# Altium PCB Ver1.0-2242_2023-12-28.pcbdoc
Units mm, origin at the board's own origin, x right, y up, seen from the top; angles counter-clockwise.
Board outline 47.51 x 70.74 mm, 2 copper layers (Top Layer, Bottom Layer); 12 components, 39 nets, 344 pads, 61 vias.
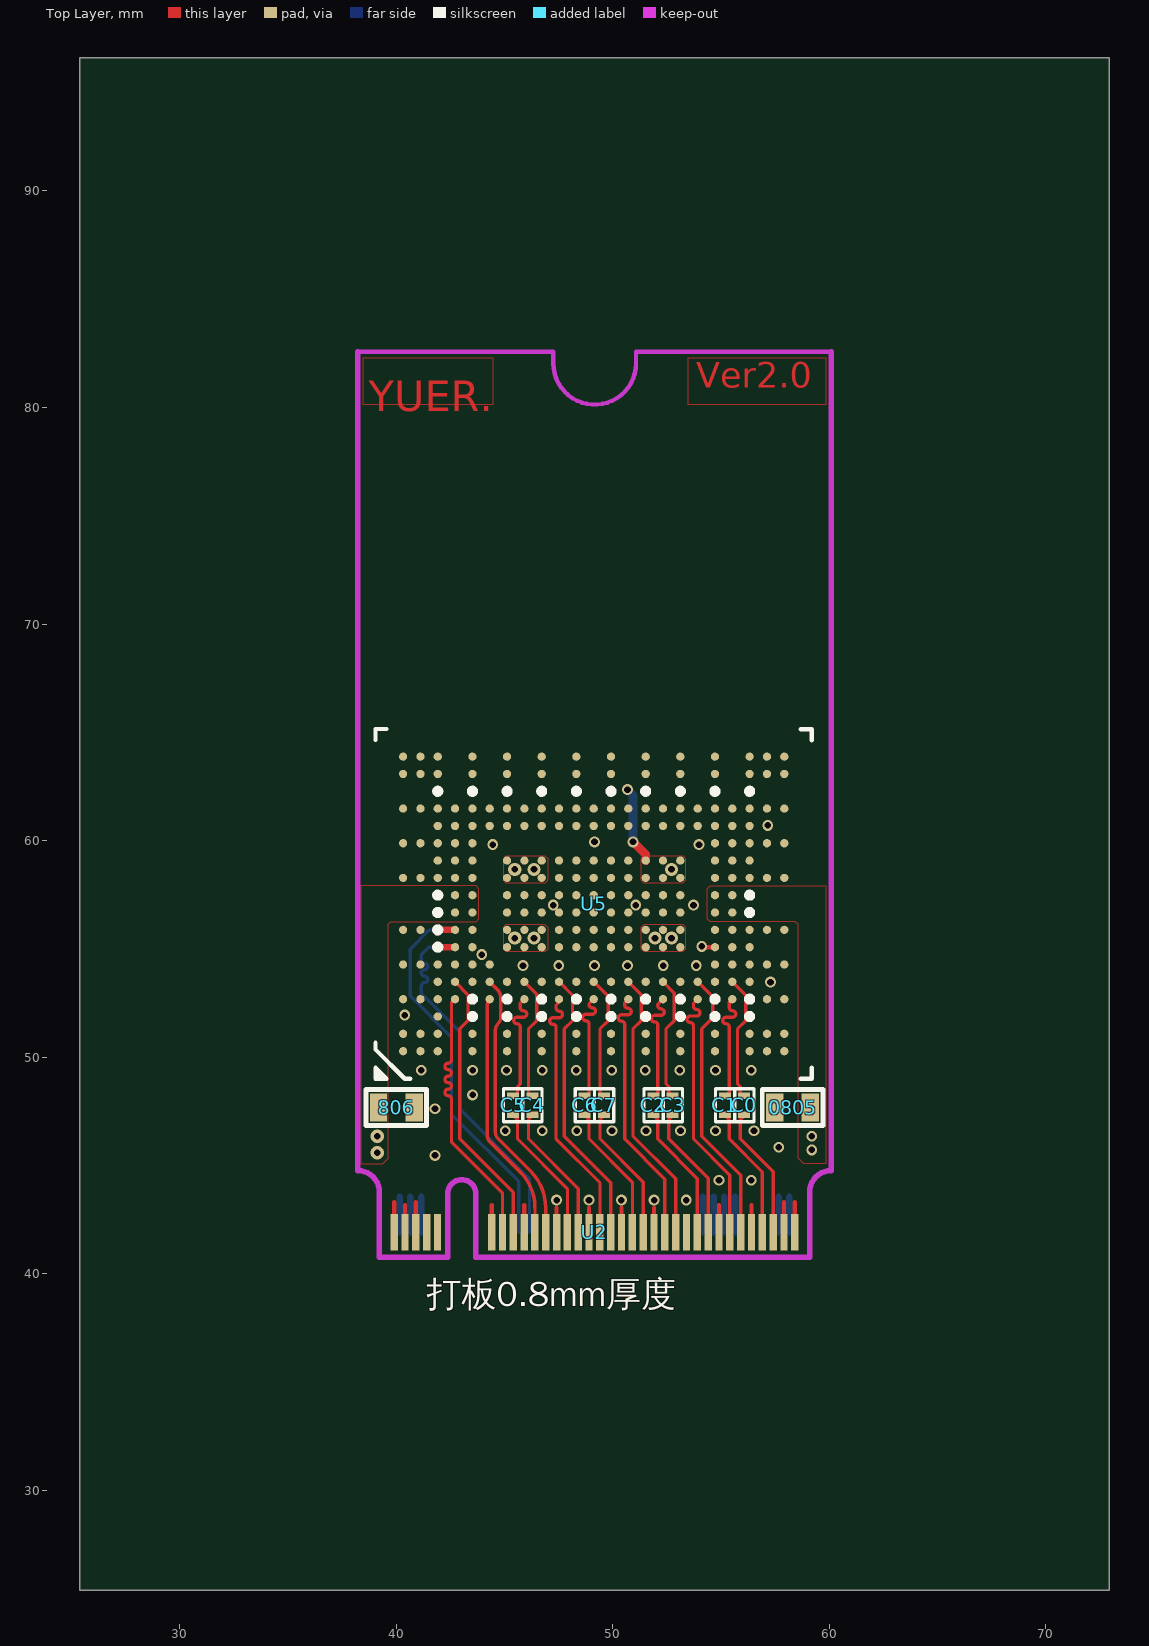
[diagram p0: Top Layer view]
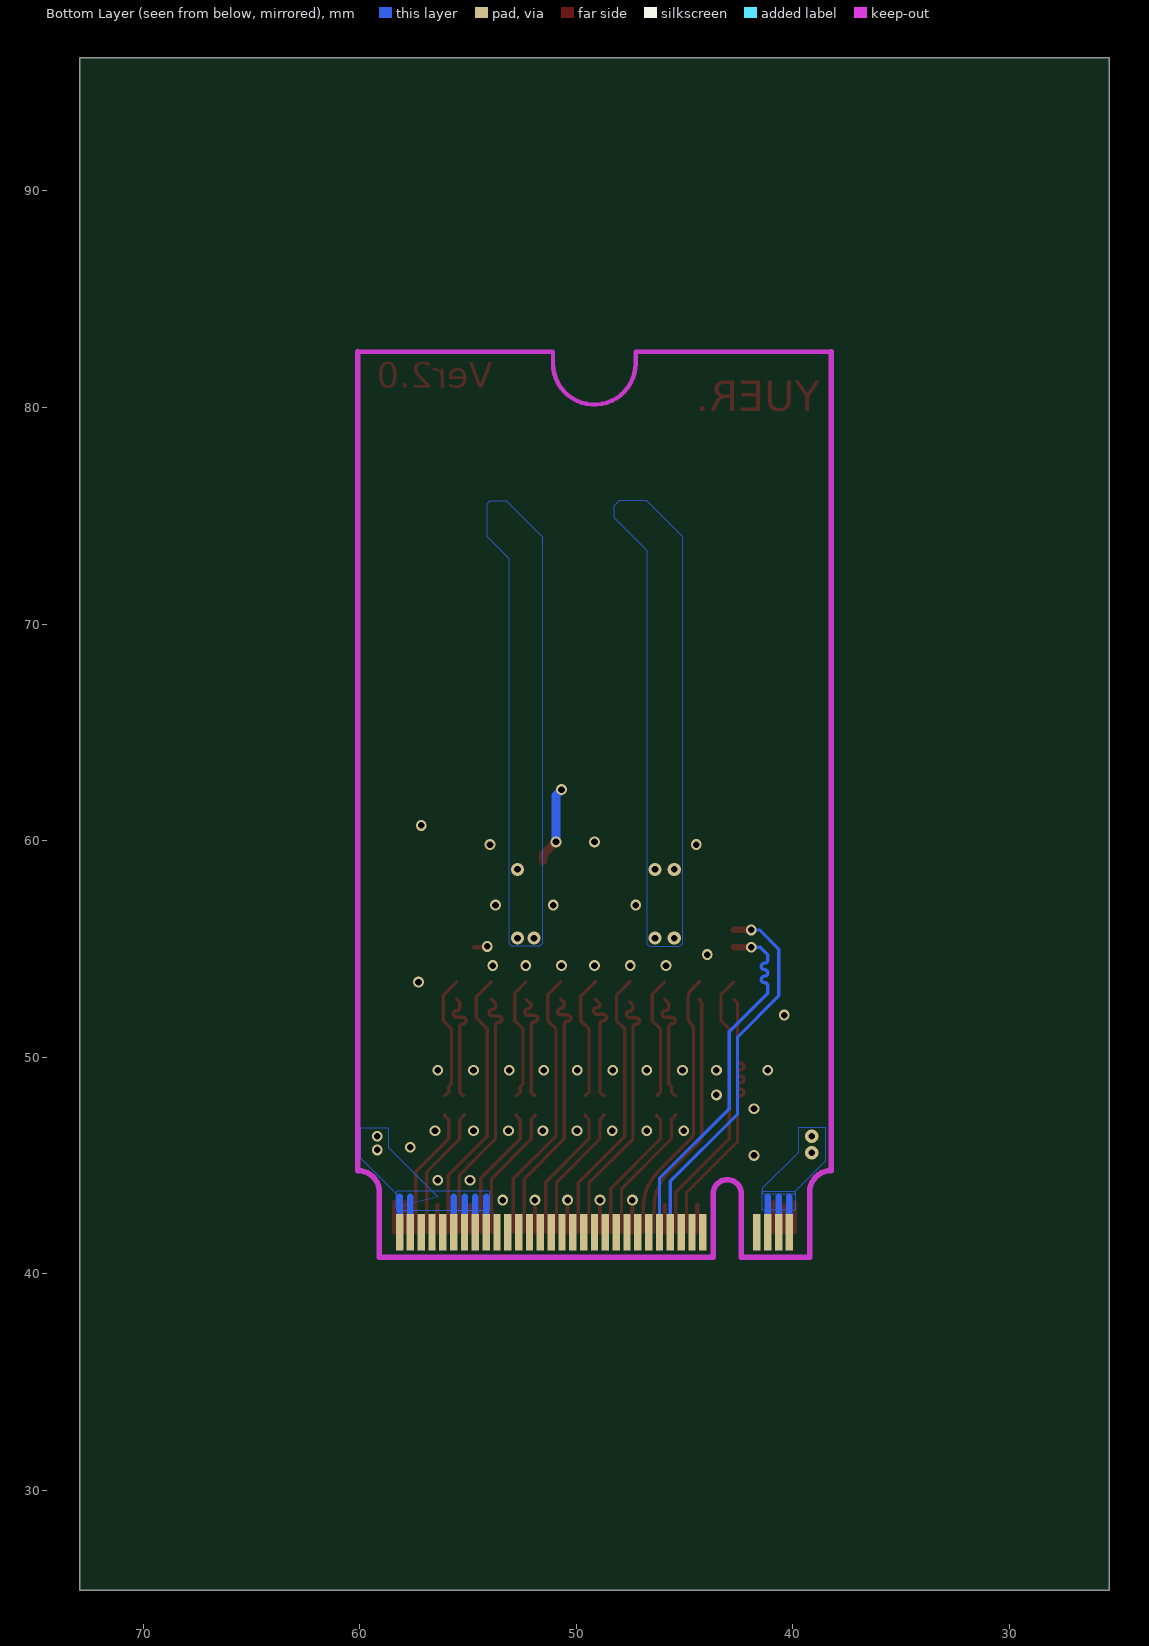
[diagram p1: Bottom Layer view, seen from below]

## Layer stack, top to bottom
Top Layer: signal copper (thickness not stored)
Dielectric: dielectric 0.32, FR-4, Dk 4.8
Bottom Layer: signal copper (thickness not stored)

## Board outline
72.913,25.4 25.4,25.4 25.4,96.139 72.913,96.139

## Components (designator, comment, footprint, x,y, rotation, side; value= is the part's Value field where it differs from the comment)
0805 "_" ?#1 59.571,48.895 r0 top
806 "_" ?#1 41.283,48.895 r0 top
C0 "0402" ?#2 57.285,47.244 r270 top
C1 "0402" ?#2 56.396,47.244 r270 top
C2 "0402" ?#2 53.094,47.244 r270 top
C3 "0402" ?#2 53.983,47.244 r270 top
C4 "0402" ?#2 47.506,47.244 r270 top
C5 "0402" ?#2 46.617,47.244 r270 top
C6 "0402" ?#2 49.919,47.244 r270 top
C7 "0402" ?#2 50.808,47.244 r270 top
U2 "M.2 M KEY FINGERS" "M.2 M KEY FINGERS" 49.157,40.767 r270 top
U5 "1620 BGA291SSD" "1620 BGA291SSD" 49.03,57.023 r0 top

## Footprints (in the part's own frame and the unit in brackets; to place one, negate y for a bottom-side part, rotate by r counter-clockwise, add the part's x,y. Pads: shape width x height; smd on the part's side, far side on the other; paste and mask are expansions set on the pad)
"1620 BGA291SSD" [mil]
  round 15.06 smd paste-3937 mask+2: A1(-342.92,-265.44) A2(-342.92,-233.94) A4(-342.92,-170.95) A6(-342.92,-107.96) A8(-342.92,-44.97) A11(-342.92,49.52) A13(-342.92,112.51) A15(-342.92,175.51) A17(-342.92,238.5) A18(-342.92,269.99) AA1(287,-265.44) AA2(287,-233.94) AA5(287,-139.45) AA6(287,-107.96) AA7(287,-76.46) AA8(287,-44.97) AA11(287,49.52) AA12(287,81.02) AA13(287,112.51) AA14(287,144.01) AA15(287,175.51) AA17(287,238.5) AA18(287,269.99) AB1(318.5,-265.44) AB2(318.5,-233.94) AB4(318.5,-170.95) AB6(318.5,-107.96) AB8(318.5,-44.97) AB11(318.5,49.52) AB13(318.5,112.51) AB15(318.5,175.51) AB17(318.5,238.5) AB18(318.5,269.99) AC1(350,-265.44) AC2(350,-233.94) AC4(350,-170.95) AC6(350,-107.96) AC8(350,-44.97) AC11(350,49.52) AC13(350,112.51) AC15(350,175.51) AC17(350,238.5) AC18(350,269.99) B1(-311.42,-265.44) B2(-311.42,-233.94) B4(-311.42,-170.95) B6(-311.42,-107.96) B8(-311.42,-44.97) B11(-311.42,49.52) B13(-311.42,112.51) B15(-311.42,175.51) B17(-311.42,238.5) B18(-311.42,269.99) C1(-279.92,-265.44) C2(-279.92,-233.94) C3(-279.92,-202.44) C4(-279.92,-170.95) C5(-279.92,-139.45) C6(-279.92,-107.96) C11(-279.92,49.52) C12(-279.92,81.02) C13(-279.92,112.51) C14(-279.92,144.01) C15(-279.92,175.51) C17(-279.92,238.5) C18(-279.92,269.99) D4(-248.43,-170.95) D5(-248.43,-139.45) D6(-248.43,-107.96) D7(-248.43,-76.46) D8(-248.43,-44.97) D9(-248.43,-13.47) D10(-248.43,18.03) D11(-248.43,49.52) D12(-248.43,81.02) D13(-248.43,112.51) D14(-248.43,144.01) D15(-248.43,175.51) E1(-216.93,-265.44) E2(-216.93,-233.94) E5(-216.93,-139.45) E6(-216.93,-107.96) E7(-216.93,-76.46) E8(-216.93,-44.97) E9(-216.93,-13.47) E10(-216.93,18.03) E11(-216.93,49.52) E12(-216.93,81.02) E13(-216.93,112.51) E14(-216.93,144.01) E15(-216.93,175.51) E17(-216.93,238.5) E18(-216.93,269.99) F4(-185.44,-170.95) F5(-185.44,-139.45) F6(-185.44,-107.96) F14(-185.44,144.01) F15(-185.44,175.51) G1(-153.94,-265.44) G2(-153.94,-233.94) G5(-153.94,-139.45) G7(-153.94,-76.46) G8(-153.94,-44.97) G9(-153.94,-13.47) G10(-153.94,18.03) G11(-153.94,49.52) G12(-153.94,81.02) G14(-153.94,144.01) G15(-153.94,175.51) G17(-153.94,238.5) G18(-153.94,269.99) H4(-122.44,-170.95) H5(-122.44,-139.45) H7(-122.44,-76.46) H8(-122.44,-44.97) H9(-122.44,-13.47) H10(-122.44,18.03) H11(-122.44,49.52) H12(-122.44,81.02) H14(-122.44,144.01) H15(-122.44,175.51) J1(-90.95,-265.44) J2(-90.95,-233.94) J5(-90.95,-139.45) J7(-90.95,-76.46) J8(-90.95,-44.97) J9(-90.95,-13.47) J10(-90.95,18.03) J11(-90.95,49.52) J12(-90.95,81.02) J14(-90.95,144.01) J15(-90.95,175.51) J17(-90.95,238.5) J18(-90.95,269.99) K4(-59.45,-170.95) K5(-59.45,-139.45) K7(-59.45,-76.46) K8(-59.45,-44.97) K9(-59.45,-13.47) K10(-59.45,18.03) K11(-59.45,49.52) K12(-59.45,81.02) K14(-59.45,144.01) K15(-59.45,175.51) L1(-27.96,-265.44) L2(-27.96,-233.94) L5(-27.96,-139.45) L7(-27.96,-76.46) L8(-27.96,-44.97) L9(-27.96,-13.47) L10(-27.96,18.03) L11(-27.96,49.52) L12(-27.96,81.02) L14(-27.96,144.01) L15(-27.96,175.51) L17(-27.96,238.5) L18(-27.96,269.99) M4(3.54,-170.95) M5(3.54,-139.45) M7(3.54,-76.46) M8(3.54,-44.97) M9(3.54,-13.47) M10(3.54,18.03) M11(3.54,49.52) M12(3.54,81.02) M14(3.54,144.01) M15(3.54,175.51) N1(35.04,-265.44) N2(35.04,-233.94) N5(35.04,-139.45) N7(35.04,-76.46) N8(35.04,-44.97) N9(35.04,-13.47) N10(35.04,18.03) N11(35.04,49.52) N12(35.04,81.02) N14(35.04,144.01) N15(35.04,175.51) N17(35.04,238.5) N18(35.04,269.99) P4(66.53,-170.95) P5(66.53,-139.45) P7(66.53,-76.46) P8(66.53,-44.97) P9(66.53,-13.47) P10(66.53,18.03) P11(66.53,49.52) P12(66.53,81.02) P14(66.53,144.01) P15(66.53,175.51) R1(98.03,-265.44) R2(98.03,-233.94) R5(98.03,-139.45) R7(98.03,-76.46) R8(98.03,-44.97) R9(98.03,-13.47) R10(98.03,18.03) R11(98.03,49.52) R12(98.03,81.02) R14(98.03,144.01) R15(98.03,175.51) R17(98.03,238.5) R18(98.03,269.99) T4(129.52,-170.95) T5(129.52,-139.45) T7(129.52,-76.46) T8(129.52,-44.97) T9(129.52,-13.47) T10(129.52,18.03) T11(129.52,49.52) T12(129.52,81.02) T14(129.52,144.01) T15(129.52,175.51) U1(161.02,-265.44) U2(161.02,-233.94) U5(161.02,-139.45) U7(161.02,-76.46) U8(161.02,-44.97) U9(161.02,-13.47) U10(161.02,18.03) U11(161.02,49.52) U12(161.02,81.02) U14(161.02,144.01) U15(161.02,175.51) U17(161.02,238.5) U18(161.02,269.99) V4(192.52,-170.95) V5(192.52,-139.45) V14(192.52,144.01) V15(192.52,175.51) W1(224.01,-265.44) W2(224.01,-233.94) W5(224.01,-139.45) W6(224.01,-107.96) W7(224.01,-76.46) W8(224.01,-44.97) W9(224.01,-13.47) W10(224.01,18.03) W11(224.01,49.52) W12(224.01,81.02) W13(224.01,112.51) W14(224.01,144.01) W15(224.01,175.51) W17(224.01,238.5) W18(224.01,269.99) Y4(255.51,-170.95) Y5(255.51,-139.45) Y6(255.51,-107.96) Y7(255.51,-76.46) Y8(255.51,-44.97) Y9(255.51,-13.47) Y10(255.51,18.03) Y11(255.51,49.52) Y12(255.51,81.02) Y13(255.51,112.51) Y14(255.51,144.01) Y15(255.51,175.51)
  silkscreen extent -393,-316 400,320
"M.2 M KEY FINGERS" [mm]
  rect 1.7x0.34 smd paste+0 mask+0.102: 1(-1.15,9.25) 3(-1.15,8.75) 5(-1.15,8.249) 7(-1.15,7.749) 9(-1.15,7.249) 11(-1.15,6.749) 13(-1.15,6.249) 15(-1.15,5.749) 17(-1.15,5.249) 19(-1.15,4.749) 21(-1.15,4.249) 23(-1.15,3.749) 25(-1.15,3.249) 27(-1.15,2.749) 29(-1.15,2.249) 31(-1.15,1.749) 33(-1.15,1.249) 35(-1.15,0.749) 37(-1.15,0.249) 39(-1.15,-0.251) 41(-1.15,-0.751) 43(-1.15,-1.251) 45(-1.15,-1.751) 47(-1.15,-2.251) 49(-1.15,-2.751) 51(-1.15,-3.251) 53(-1.15,-3.751) 55(-1.15,-4.251) 57(-1.15,-4.751) 67(-1.15,-7.251) 69(-1.15,-7.751) 71(-1.15,-8.251) 73(-1.15,-8.751) 75(-1.15,-9.251)
  rect 1.7x0.34 smd far side paste+0 mask+0.102: 2(-1.15,9) 4(-1.15,8.501) 6(-1.15,8.001) 8(-1.15,7.501) 10(-1.15,7.001) 12(-1.15,6.501) 14(-1.15,6.001) 16(-1.15,5.501) 18(-1.15,5.001) 20(-1.151,4.499) 22(-1.15,4.001) 24(-1.15,3.501) 26(-1.15,3.001) 28(-1.15,2.501) 30(-1.15,2.001) 32(-1.15,1.501) 34(-1.15,1.001) 36(-1.15,0.501) 38(-1.15,0.001) 40(-1.15,-0.499) 42(-1.151,-0.998) 44(-1.15,-1.499) 46(-1.15,-1.999) 48(-1.15,-2.499) 50(-1.15,-2.999) 52(-1.15,-3.499) 54(-1.15,-3.999) 56(-1.15,-4.499) 58(-1.15,-4.999) 68(-1.15,-7.499) 70(-1.15,-7.999) 72(-1.15,-8.499) 74(-1.15,-8.999)
  Keep-Out Layer lines w0.254: -3,-9.93 0,-9.93 0,-6.78 -2.9,-6.78 ; -2.9,-5.48 0,-5.48 0,9.93 -3,9.93
  Keep-Out Layer lines w0.254: -4,-10.93 cw(c-3,-10.93) -3,-9.93 ; -2.9,-6.78 cw(c-2.931,-6.13) -2.9,-5.48 ; -3,9.93 cw(c-3,10.93) -4,10.93
?#1 [mm]
  rect 0.8x1.3 smd paste+0 mask+0.05: 1(-0.445,-1.217) 2(-2.095,-1.217)
  silkscreen extent -2.67,-2.04 0.13,-0.39
?#2 [mm]
  rect 0.3x0.55 smd paste+0 mask+0.051: 1(-0.985,-1.217) 1(-0.096,-1.217)
  silkscreen extent -1.31,-1.66 0.22,-0.77

## Via types
v1: diameter 0.5, hole 0.305, Top Layer to Bottom Layer, tented both sides, 52 vias
v2: diameter 0.61, hole 0.305, Top Layer to Bottom Layer, tented both sides, 9 vias

## Nets (pads, with @x,y where several pads share a name; then routed paths per layer and width w, separated by ;. In a path a pad name is that pad's centre, name@x,y a point inside that pad or via, vN(x,y) a via of type N, cw(c..) or ccw(c..) an arc to the next point about the centre after c; other vN are vias at no path point)
1.2V: U5.G7 U5.G8 U5.G11 U5.G12 U5.H7 U5.H8 U5.H11 U5.H12 U5.J7 U5.J8 U5.J11 U5.J12
  other v2: 45.474,55.499 46.363,55.499 45.474,58.674 46.363,58.674
1.8V: U5.R7 U5.R8 U5.R11 U5.T7 U5.T8 U5.T11 U5.T12 U5.U7 U5.U8 U5.U11 U5.U12
  other v2: 51.951,55.499 52.713,55.499 52.713,58.674
3.3V: 0805.1 806.2 U2.2 U2.4 U2.12 U2.14 U2.16 U2.18 U2.70 U2.72 U2.74 U5.D9 U5.D10 U5.E9 U5.E10 U5.W9 U5.W10 U5.Y9 U5.Y10 | length 14.8
  Bottom Layer w0.3: U2.74 40.157,43.561 ; 40.648,43.561 U2.72 ; U2.70 41.157,43.561 ; U2.18 54.157,43.561 ; U2.16 54.658,43.561 ; U2.14 55.157,43.561 ; U2.12 55.657,43.561 ; U2.4 57.657,43.561 ; U2.2 58.157,43.561
  other v1: 59.19,45.72 59.19,46.355
  other v2: 39.124,45.593 39.124,46.355
GND: 0805.2 806.1 U2.1 U2.3 U2.9 U2.15 U2.21 U2.27 U2.33 U2.39 U2.45 U2.51 U2.57 U2.71 U2.73 U2.75 U5.AA1 U5.AA2 U5.AA5 U5.AA14 U5.AA15 U5.C1 U5.C2 U5.C3 U5.C4 U5.C5 U5.C15 U5.D6 U5.D11 U5.E1 U5.E2 U5.E5 U5.E6 U5.E7 U5.E11 U5.E14 U5.E15 U5.F6 U5.G1 U5.G2 U5.G5 U5.G9 U5.G10 U5.G14 U5.G15 U5.H9 U5.H10 U5.J1 U5.J2 U5.J5 U5.J9 U5.J10 U5.J14 U5.J15 U5.K7 U5.K8 U5.K9 U5.K10 U5.K11 U5.K12 U5.L1 U5.L2 U5.L5 U5.L14 U5.L15 U5.M9 U5.M10 U5.N1 U5.N2 U5.N5 U5.N14 U5.N15 U5.P7 U5.P8 U5.P9 U5.P10 U5.P11 U5.P12 U5.R1 U5.R2 U5.R5 U5.R9 U5.R10 U5.R14 U5.R15 U5.T9 U5.T10 U5.U1 U5.U2 U5.U5 U5.U9 U5.U10 U5.U14 U5.U15 U5.W1 U5.W2 U5.W5 U5.W6 U5.W11 U5.W14 U5.W15 U5.Y6 U5.Y11 U5.Y13 | length 16.4
  Top Layer w0.2: U2.75 39.906,43.307 ; U2.73 40.406,43.18 ; U2.71 40.906,43.307 ; U2.57 44.406,43.18 ; U2.51 45.906,43.18 ; U2.45 47.406,43.053 ; U2.39 48.906,43.053 ; U2.33 50.406,43.053 ; U2.27 51.906,43.053 ; U2.15 54.906,43.18 ; U2.9 56.406,43.18 ; U2.3 57.906,43.307 ; U2.1 58.407,43.307
  other v1: 47.407,43.405 48.903,43.405 50.397,43.405 51.907,43.405 53.397,43.405 54.907,44.323 56.396,44.323 41.791,45.466 57.666,45.847 45.037,46.609 46.744,46.609 48.337,46.609 49.967,46.609 51.537,46.609 53.127,46.609 54.745,46.609 56.523,46.609 41.791,47.625 43.527,48.26 41.156,49.403 43.527,49.403 45.093,49.403 46.744,49.403 48.317,49.403 49.957,49.403 51.497,49.403 53.094,49.403 54.745,49.403 56.396,49.403 40.394,51.943 57.285,53.467 45.855,54.229 47.506,54.229 49.157,54.229 50.681,54.229 52.332,54.229 53.856,54.229 43.95,54.737 47.252,57.023 51.062,57.023 53.729,57.023 44.458,59.817 53.983,59.817 49.157,59.944 57.158,60.706
LED:  | length 0.6
  Top Layer w0.2: v1(54.11,55.118) 54.148,55.08 54.719,55.08
NC: 
S$17489: 
S$81905: 
S$82656: U2.13 U5.V4 | length 12.3
  Top Layer w0.15: U5.V4 53.729,52.492 53.729,52.353 ccw(c53.879,52.353) 53.879,52.203 cw(c53.877,52.053) 53.879,51.903 53.729,51.903 53.579,51.903 ccw(c53.581,51.753) 53.579,51.603 cw(c53.579,51.453) 53.729,51.453 53.729,46.228 55.405,44.552 U2.13
S$82660: U2.11 U5.V5 | length 12.8
  Top Layer w0.15: U5.V5 54.618,52.784 54.618,51.816 54.11,51.308 54.11,46.355 55.905,44.559 U2.11
S$89547: C1.1 U2.7 U5.Y4 | length 11.6
  Top Layer w0.15: C1.1@55.178,48.229 55.222,48.229 55.38,48.387 55.38,48.641 55.38,51.395 ccw(c55.23,51.395) 55.23,51.545 cw(c55.232,51.695) 55.23,51.845 55.38,51.845 55.53,51.845 ccw(c55.528,51.995) 55.53,52.145 cw(c55.53,52.295) 55.38,52.295 55.38,52.541 U5.Y4@55.52,52.681 ; C1.1@55.179,47.341 55.38,47.117 55.38,46.863 55.38,46.228 56.906,44.701 U2.7
S$89551: C0.1 U2.5 U5.Y5 | length 11.9
  Top Layer w0.15: U5.Y5 56.142,52.86 56.142,51.689 55.761,51.308 55.761,48.768 55.888,48.641 55.888,48.387 C0.1@56.068,48.23 ; C0.1@56.068,47.341 56.068,47.297 55.888,47.117 55.888,46.863 55.888,46.228 57.407,44.709 U2.5
S$89662: C2.1@51.876,47.34 | length 6.3
  Top Layer w0.15: C2.1@51.877,47.341 52.078,47.117 52.078,46.863 52.078,46.228 53.906,44.399 53.906,43.002 ; 53.906,41.917 53.906,43.053
S$89666: C3.1@52.765,47.34 | length 6.3
  Top Layer w0.15: C3.1@52.766,47.341 52.766,47.297 52.586,47.117 52.586,46.863 52.586,46.228 54.407,44.407 54.407,42.959 ; 54.406,41.917 54.406,43.053
S$89676: C2.1@51.876,48.229 U5.T4 | length 5.5
  Top Layer w0.15: C2.1@51.876,48.229 51.92,48.229 52.078,48.387 52.078,48.514 52.078,51.484 ccw(c51.928,51.484) 51.928,51.634 cw(c51.93,51.784) 51.928,51.934 52.078,51.934 52.228,51.934 ccw(c52.226,52.084) 52.228,52.234 cw(c52.228,52.384) 52.078,52.384 52.078,52.439 U5.T4@52.319,52.681
S$89680: C3.1@52.765,48.229 U5.T5 | length 5.8
  Top Layer w0.15: U5.T5 52.84,52.962 52.84,51.689 52.459,51.308 52.459,48.768 52.586,48.641 52.586,48.514 52.586,48.387 C3.1@52.766,48.23
S$89714: U5.P5 | length 12.8
  Top Layer w0.15: U5.P5 51.316,52.885 51.316,51.689 50.935,51.308 50.935,46.355 52.906,44.384 52.906,43.053 52.906,41.917
S$89718: U5.P4 | length 12.4
  Top Layer w0.15: U5.P4@50.719,52.681 50.554,52.515 50.554,52.409 ccw(c50.704,52.409) 50.704,52.259 cw(c50.702,52.109) 50.704,51.959 50.554,51.959 50.404,51.959 ccw(c50.406,51.809) 50.404,51.659 cw(c50.404,51.509) 50.554,51.509 50.554,46.228 52.405,44.376 52.405,43.053 52.406,41.917
S$89746: C7.1@49.59,47.34 | length 6.4
  Top Layer w0.15: C7.1@49.591,47.341 49.591,47.297 49.411,47.117 49.411,46.99 49.411,46.228 51.406,44.233 51.406,42.967 ; 51.406,41.917 51.406,43.053
S$89750: C6.1@48.701,47.34 | length 6.3
  Top Layer w0.15: C6.1@48.702,47.341 48.903,47.117 48.903,46.99 48.903,46.228 50.907,44.224 50.907,43.053 ; 50.906,41.917 50.906,43.053
S$89763: C6.1@48.701,48.229 U5.M4 | length 5.5
  Top Layer w0.15: C6.1@48.701,48.229 48.745,48.229 48.903,48.387 48.903,48.514 48.903,51.538 ccw(c48.753,51.538) 48.753,51.688 cw(c48.755,51.838) 48.753,51.988 48.903,51.988 49.053,51.988 ccw(c49.051,52.138) 49.053,52.288 cw(c49.053,52.438) 48.903,52.438 48.903,52.464 U5.M4@49.12,52.681
S$89767: C7.1@49.59,48.229 U5.M5 | length 5.8
  Top Layer w0.15: U5.M5@49.12,53.481 49.792,52.809 49.792,51.689 49.411,51.308 49.411,48.514 49.411,48.387 C7.1@49.591,48.23
S$89801: U5.K5 | length 12.9
  Top Layer w0.15: U5.K5@47.52,53.481 48.141,52.86 48.141,51.689 47.76,51.308 47.76,46.355 49.906,44.209 49.906,43.053 49.906,41.917
S$89805: U5.K4 | length 12.5
  Top Layer w0.15: U5.K4@47.524,52.554 47.383,52.413 47.383,52.276 ccw(c47.533,52.276) 47.533,52.126 cw(c47.532,51.976) 47.533,51.826 47.383,51.826 47.233,51.826 ccw(c47.235,51.676) 47.233,51.526 cw(c47.233,51.376) 47.383,51.376 47.384,46.223 49.411,44.196 49.411,42.926 ; 49.406,41.917 49.406,43.053
S$89833: C4.1@46.288,47.34 | length 6.4
  Top Layer w0.15: C4.1@46.289,47.341 46.289,47.297 46.109,47.117 46.109,46.863 46.109,46.228 48.406,43.931 48.406,43.053 48.406,41.917
S$89837: C5.1@45.399,47.34 | length 6.5
  Top Layer w0.15: C5.1@45.4,47.341 45.601,47.117 45.601,46.863 45.601,46.228 47.907,43.922 47.907,43.053 ; 47.906,41.917 47.906,43.053
S$89847: C5.1@45.399,48.229 U5.H4 | length 5.5
  Top Layer w0.15: C5.1@45.399,48.229 45.443,48.229 45.601,48.387 45.601,48.514 45.601,48.641 45.728,48.768 45.728,51.394 ccw(c45.578,51.394) 45.578,51.544 cw(c45.58,51.694) 45.578,51.844 45.728,51.844 45.878,51.844 ccw(c45.876,51.994) 45.878,52.144 cw(c45.878,52.294) 45.728,52.294 45.728,52.489 U5.H4@45.92,52.681
S$89851: C4.1@46.288,48.229 U5.H5 | length 5.7
  Top Layer w0.15: U5.H5 46.49,52.911 46.49,51.689 46.109,51.308 46.109,48.514 46.109,48.387 C4.1@46.289,48.23
S$89888: U5.F5 | length 12.7
  Top Layer w0.15: 46.906,41.917 46.906,43.053
  Top Layer w0.16: U5.F5@44.319,53.481 ccw(c44.326,53.481) 44.321,53.476 44.585,53.213 44.659,53.139 cw(c44.225,52.705) 44.839,52.705 44.839,51.869 cw(c44.405,51.869) 44.712,51.562 ccw(c45.018,51.255) 44.585,51.255 44.585,51.054 44.585,46.535 ccw(c45.018,46.535) 44.712,46.228 46.212,44.728 cw(c44.537,43.053) 46.906,43.053
S$89898: U5.F4 | length 11.6
  Top Layer w0.15: 46.406,41.917 46.406,43.053
  Top Layer w0.16: U5.F4@44.319,52.681 ccw(c44.599,52.401) 44.204,52.401 44.204,50.927 44.204,46.408 ccw(c44.637,46.408) 44.331,46.101 45.718,44.714 cw(c44.057,43.053) 46.406,43.053
S$89926: U5.D5 | length 13
  Top Layer w0.15: U5.D5 43.315,52.885 43.315,51.689 42.934,51.308 42.934,46.228 45.405,43.757 45.405,43.053 ; 45.406,41.917 45.406,43.053
S$89930: U5.D4 | length 12.8
  Top Layer w0.15: U5.D4@42.72,52.681 42.553,52.514 42.553,49.877 cw(c42.403,49.877) 42.403,49.727 ccw(c42.403,49.577) 42.403,49.427 cw(c42.403,49.277) 42.553,49.277 cw(c42.403,49.277) 42.403,49.127 ccw(c42.403,48.977) 42.403,48.827 cw(c42.403,48.677) 42.553,48.677 cw(c42.403,48.677) 42.403,48.527 ccw(c42.403,48.377) 42.403,48.227 cw(c42.403,48.077) 42.553,48.077 42.553,46.101 44.907,43.746 44.907,43.053 ; 44.906,41.917 44.906,43.053
S$89994: U2.50 U2.52 | length 34.9
  Top Layer w0.3: v1(41.92,55.081) 42.719,55.081 ; v1(41.92,55.881) 42.719,55.881
  Bottom Layer w0.15: v1(41.92,55.081) 41.5,55.081 41.156,54.737 41.156,54.495 ccw(c41.306,54.495) 41.306,54.345 cw(c41.306,54.195) 41.306,54.044 ccw(c41.306,53.894) 41.156,53.894 ccw(c41.306,53.894) 41.306,53.744 cw(c41.306,53.594) 41.306,53.444 ccw(c41.306,53.294) 41.156,53.295 41.156,52.959 42.934,51.181 42.934,50.739 42.934,47.625 46.157,44.402 U2.50 ; v1(41.92,55.881) 41.537,55.88 40.648,54.991 40.648,52.832 42.553,50.927 42.553,50.744 42.553,47.371 45.657,44.267 U2.52
S$115904: 
S$116199: 
S$116216: 
S$116224: 
S$122351: 
VQH: U5.R12 | length 3.6
  Top Layer w0.4: v1(50.935,59.944) 51.52,59.359 U5.R12
  Bottom Layer w0.4: v1(50.681,62.357) 50.935,62.103 v1(50.935,59.944)
pads on no net: U2.6 U2.8 U2.10 U2.17 U2.19 U2.20 U2.22 U2.23 U2.24 U2.25 U2.26 U2.28 U2.29 U2.30 U2.31 U2.32 U2.34 U2.35 U2.36 U2.37 U2.38 U2.40 U2.41 U2.42 U2.43 U2.44 U2.46 U2.47 U2.48 U2.49 U2.53 U2.54 U2.55 U2.56 U2.58 U2.67 U2.68 U2.69 U5.A1 U5.A2 U5.A4 U5.A6 U5.A8 U5.A11 U5.A13 U5.A15 U5.A17 U5.A18 U5.AA6 U5.AA7 U5.AA8 U5.AA11 U5.AA12 U5.AA13 U5.AA17 U5.AA18 U5.AB1 U5.AB2 U5.AB4 U5.AB6 U5.AB8 U5.AB11 U5.AB13 U5.AB15 U5.AB17 U5.AB18 U5.AC1 U5.AC2 U5.AC4 U5.AC6 U5.AC8 U5.AC11 U5.AC13 U5.AC15 U5.AC17 U5.AC18 U5.B1 U5.B2 U5.B4 U5.B6 U5.B8 U5.B11 U5.B13 U5.B15 U5.B17 U5.B18 U5.C6 U5.C11 U5.C12 U5.C13 U5.C14 U5.C17 U5.C18 U5.D7 U5.D8 U5.D12 U5.D13 U5.D14 U5.D15 U5.E8 U5.E12 U5.E13 U5.E17 U5.E18 U5.F14 U5.F15 U5.G17 U5.G18 U5.H14 U5.H15 U5.J17 U5.J18 U5.K14 U5.K15 U5.L7 U5.L8 U5.L9 U5.L10 U5.L11 U5.L12 U5.L17 U5.L18 U5.M7 U5.M8 U5.M11 U5.M12 U5.M14 U5.M15 U5.N7 U5.N8 U5.N9 U5.N10 U5.N11 U5.N12 U5.N17 U5.N18 U5.P14 U5.P15 U5.R17 U5.R18 U5.T14 U5.T15 U5.U17 U5.U18 U5.V14 U5.V15 U5.W7 U5.W8 U5.W12 U5.W13 U5.W17 U5.W18 U5.Y7 U5.Y8 U5.Y12 U5.Y14 U5.Y15

## Polygon pours and split planes (outlines as drawn)
3.3V on Bottom Layer (solid): 58.301,42.926 53.983,42.926 53.983,43.815 58.301,43.815
3.3V on Bottom Layer (solid): 39.886,42.926 41.41,42.926 41.41,43.815 39.886,43.815
3.3V on Bottom Layer (solid): 39.759,46.736 39.759,45.593 41.41,43.942 41.41,43.688 39.886,43.688 39.886,43.815 38.489,45.212 38.489,46.736
3.3V on Bottom Layer (solid): 58.301,43.053 58.301,43.688 59.952,45.339 59.952,46.736 58.682,46.736 58.682,45.847 56.396,43.561
1.8V on Bottom Layer (solid): 51.57,55.245 51.697,55.118 52.967,55.118 53.094,55.245 53.094,73.025 54.11,74.041 54.11,75.565 53.983,75.692 53.221,75.692 51.57,74.041
1.2V on Bottom Layer (solid): 46.744,55.245 46.617,55.118 45.22,55.118 45.093,55.245 45.093,74.041 46.744,75.692 48.014,75.692 48.268,75.438 48.268,74.93 46.744,73.406
3.3V on Top Layer (solid): 39.632,45.339 39.632,56.134 39.759,56.261 43.696,56.261 43.823,56.388 43.823,57.785 43.696,57.912 38.362,57.912 38.362,45.085 39.378,45.085
3.3V on Top Layer (solid): 58.555,45.339 58.555,56.134 58.428,56.261 54.491,56.261 54.364,56.388 54.364,57.785 54.491,57.912 59.825,57.912 59.825,45.085 58.809,45.085
1.8V on Top Layer (solid): 51.443,59.309 53.221,59.309 53.348,59.182 53.348,58.166 53.221,58.039 51.443,58.039 51.316,58.166 51.316,59.182
1.8V on Top Layer (solid): 51.443,56.134 53.221,56.134 53.348,56.007 53.348,54.991 53.221,54.864 51.443,54.864 51.316,54.991 51.316,56.007
1.2V on Top Layer (solid): 45.093,59.309 46.871,59.309 46.998,59.182 46.998,58.166 46.871,58.039 45.093,58.039 44.966,58.166 44.966,59.182
1.2V on Top Layer (solid): 45.093,56.134 46.871,56.134 46.998,56.007 46.998,54.991 46.871,54.864 45.093,54.864 44.966,54.991 44.966,56.007
NC on Top Layer (solid): 53.475,82.296 59.825,82.296 59.825,80.137 53.475,80.137
NC on Top Layer (solid): 38.489,82.296 44.458,82.296 44.458,80.137 38.489,80.137

## Keep-outs
Keep-Out Layer:
  lines w0.2 net S$115904: 47.256,82.042 ccw(c49.165,82.042) 51.074,82.042

## Other copper
Top Layer:
  text "Ver2.0" at 53.856,80.518 h2.03
  text "YUER." at 38.743,79.818 h1.4

## Silkscreen, mask and mechanical layers (free items; w line width, h text height)
Top Overlay:
  text "打板0.8mm厚度" at 41.41,38.1 h2.03
Top Solder:
  rectangle: 38.997,40.513 59.444,42.926
  region net S$116216: 46.617,82.677 46.617,81.229 48.125,79.721 50.396,79.721 51.174,80.499 51.174,80.798 51.54,81.164 51.54,83.215 51.316,83.439 47.252,83.439 46.998,83.185
  lines w1 net S$116199: 46.617,82.042 ccw(c49.157,82.042) 51.697,82.042
  lines w1 net S$116216: 46.617,82.042 46.617,82.677
  lines w1 net S$116224: 51.697,82.042 51.697,82.677
Bottom Solder:
  rectangle: 38.997,40.513 59.444,42.926
Document:
  lines w0.2 net S$122351: 44.331,51.689 44.331,46.101 46.617,43.815 46.617,43.053